# EAGLE board Task-2-Circuit (EAGLE 9.7.0)

Size 210 x 62.07 mm. Coordinates in mm from the lower left corner, seen from the top.
Outline: 0,0 210,0 210,62.07 0,62.07 0,0
Copper layers (1*16): Top 0.035mm / dielectric 1.5mm / Bottom 0.035mm
Design rules "default": minimum track width 6mil, minimum drill 0.35mm, track to track 6mil, track to pad 6mil, pad to pad 6mil, via to via 6mil, smd to smd 6mil, copper to edge 40mil, drill to drill 6mil, minimum pad ring 10mil, minimum via ring 8mil, stop-mask expansion 4mil, vias tented up to drill 0mil, thermal gap 10mil

## Footprints (pad centres in the part's own frame; a part is rotated, then mirrored left to right if it is on the bottom)
BATTERY-GENERIC = drill 1.118 pad 3.15 octagon: + 2.54,0; - -2.54,0
CAP-THRU-2.54MM = drill 1.016 pad 1.88: 1 -1.27,0; 2 1.27,0
LEDRD254W60D565H860B = drill 0.981 pad 1.581: 1 -1.27,0; 2 1.27,0
RESAD1016W63L850D250B = drill 0.83 pad 1.43: 1 -5.08,0; 2 5.08,0
DIP762W53P254L1969H508Q14B = drill 0.743 pad 1.343: 1 -3.81,7.62; 2 -3.81,5.08; 3 -3.81,2.54; 4 -3.81,0; 5 -3.81,-2.54; 6 -3.81,-5.08; 7 -3.81,-7.62; 8 3.81,-7.62; 9 3.81,-5.08; 10 3.81,-2.54; 11 3.81,0; 12 3.81,2.54; 13 3.81,5.08; 14 3.81,7.62
DIP826W53P254L959H508Q8B = drill 0.786 pad 1.386: 1 -4.13,3.81; 2 -4.13,1.27; 3 -4.13,-1.27; 4 -4.13,-3.81; 5 4.13,-3.81; 6 4.13,-1.27; 7 4.13,1.27; 8 4.13,3.81

## Placement (x,y rotation side)
BATMAIN_POWER  4.5V  [BATTERY-GENERIC]  201.75,8.26 0 top
C2  0.01u  [CAP-THRU-2.54MM]  30.46,42.94 0 top
C4  20u  [CAP-THRU-2.54MM]  40.62,42.94 0 top
D1  RED  [LEDRD254W60D565H860B]  114.28,48.02 180 top
D2  RED  [LEDRD254W60D565H860B]  124.44,48.02 180 top
D3  RED  [LEDRD254W60D565H860B]  119.36,48.02 180 top
D4  RED  [LEDRD254W60D565H860B]  50.78,42.94 180 top
D5  RED  [LEDRD254W60D565H860B]  129.52,48.02 180 top
R1  1k  [RESAD1016W63L850D250B]  115.55,35.32 90 top
R2  1k  [RESAD1016W63L850D250B]  67.29,17.54 90 top
R3  60k  [RESAD1016W63L850D250B]  6.33,37.86 90 top
R4  42k  [RESAD1016W63L850D250B]  11.41,37.86 90 top
R5  1k  [RESAD1016W63L850D250B]  74.91,17.54 90 top
R6  1k  [RESAD1016W63L850D250B]  69.83,53.1 90 top
R7  1k  [RESAD1016W63L850D250B]  77.45,53.1 90 top
R8  1k  [RESAD1016W63L850D250B]  120.63,35.32 90 top
R9  500  [RESAD1016W63L850D250B]  52.05,35.32 90 top
R11  1k  [RESAD1016W63L850D250B]  125.71,35.32 90 top
R12  1k  [RESAD1016W63L850D250B]  130.79,35.32 90 top
R13  1k  [RESAD1016W63L850D250B]  90.15,53.1 90 top
R14  1k  [RESAD1016W63L850D250B]  97.77,53.1 90 top
R15  1k  [RESAD1016W63L850D250B]  87.61,17.54 90 top
R17  1k  [RESAD1016W63L850D250B]  95.23,17.54 90 top
U1  74HC74_PDIP  [DIP762W53P254L1969H508Q14B]  74.91,36.59 90 top
U2  LM555_DIP  [DIP826W53P254L959H508Q8B]  25.38,36.59 90 top
U3  74HC74_PDIP  [DIP762W53P254L1969H508Q14B]  95.23,36.59 90 top

## Library data of the parts
BATMAIN_POWER C2 C4 R1-R9 R11-R15 R17 U1 U3 = Tinkercad
D1-D5 = Tinkercad; CATEGORY: Opto-Electronic; SUB-CATEGORY: LED; VALUE: LED_RED
U2 = Tinkercad; CATEGORY: IC_Clock-Timing; CURRENT-SUPPLY: 10mA; DESCRIPTION: IC OSC SINGLE TIMER 100KHZ 8-DIP; FREQUENCY: 100kHz; MANUFACTURER: Texas Instruments; MPN: LM555CN/NOPB; OPERATING_TEMP: 0°C to 70°C; PART_STATUS: Active; ROHS_COMPLIANT: ROHS3 Compliant; SUB-CATEGORY: Timer

## Nets
BATMAIN_POWER+: BATMAIN_POWER.+ R2.1 R3.1 R5.1 R6.2 R7.2 R13.2 R14.2 R15.1 R17.1 U1.14 U2.4 U2.8 U3.14
BATMAIN_POWER-: BATMAIN_POWER.- C2.2 C4.2 D1.2 D2.2 D3.2 D4.2 D5.2 U1.7 U2.1 U3.7
D1_A: D1.1 R1.2
D2_A: D2.1 R11.2
D3_A: D3.1 R8.2
D4_A: D4.1 R9.2
D5_A: D5.1 R12.2
U1_1!Q: U1.2 U1.6 U1.11
U1_1Q: R12.1 U1.5
U1_2Q: R11.1 U1.9
U1_CLK1: R9.1 U1.3 U2.3
U1_CLR1: R2.2 U1.1
U1_CLR2: R6.1 U1.13
U1_PRE1: R5.2 U1.4
U1_PRE2: R7.1 U1.10
U2_CV: C2.1 U2.5
U2_DIS: R3.2 R4.1 U2.7
U2_TR: C4.1 R4.2 U2.2 U2.6
U3_1Q: R1.1 U3.5
U3_2!Q: U3.3 U3.8 U3.12
U3_2Q: R8.1 U3.9
U3_CLK2: U1.8 U1.12 U3.11
U3_CLR1: R15.2 U3.1
U3_CLR2: R13.1 U3.13
U3_D1: U3.2 U3.6
U3_PRE1: R17.2 U3.4
U3_PRE2: R14.1 U3.10

## Tracks (layer width: path | path; a pad name or v marks a point on that pad's centre or on a via)
BATMAIN_POWER+  (13 unrouted)
BATMAIN_POWER-  (10 unrouted)
D1_A  (1 unrouted)
D2_A  (1 unrouted)
D3_A  (1 unrouted)
D4_A  (1 unrouted)
D5_A  (1 unrouted)
U1_1!Q  (2 unrouted)
U1_1Q  (1 unrouted)
U1_2Q  (1 unrouted)
U1_CLK1  (2 unrouted)
U1_CLR1  (1 unrouted)
U1_CLR2  (1 unrouted)
U1_PRE1  (1 unrouted)
U1_PRE2  (1 unrouted)
U2_CV  (1 unrouted)
U2_DIS  (2 unrouted)
U2_TR  (3 unrouted)
U3_1Q  (1 unrouted)
U3_2!Q  (2 unrouted)
U3_2Q  (1 unrouted)
U3_CLK2  (2 unrouted)
U3_CLR1  (1 unrouted)
U3_CLR2  (1 unrouted)
U3_D1  (1 unrouted)
U3_PRE1  (1 unrouted)
U3_PRE2  (1 unrouted)